# EAGLE board SWARMESH (EAGLE 9.2.0)

Size 100 x 80 mm. Coordinates in mm from the lower left corner, seen from the top.
Outline: 0,0 100,0 100,80 0,80 0,0
Copper layers (1*16): Top 0.035mm / dielectric 1.5mm / Bottom 0.035mm
Design rules "default": minimum track width 6mil, minimum drill 0.35mm, track to track 6mil, track to pad 6mil, pad to pad 6mil, via to via 6mil, smd to smd 6mil, copper to edge 40mil, drill to drill 6mil, minimum pad ring 10mil, minimum via ring 8mil, stop-mask expansion 4mil, vias tented up to drill 0mil, thermal gap 10mil

## Footprints (pad centres in the part's own frame; a part is rotated, then mirrored left to right if it is on the bottom)
1X1-BIGPOGO = drill 1.4 pad 2.54 long: P$1 0,0
C050-024X044 = drill 0.813 octagon: 1 -2.54,0; 2 2.54,0
E2,5-7 = drill 0.813 pad 1.778: + -1.27,0 | drill 0.813 pad 1.778 octagon: - 1.27,0
DIL16 = drill 0.813 long: 1 -8.89,-3.81; 2 -6.35,-3.81; 3 -3.81,-3.81; 4 -1.27,-3.81; 5 1.27,-3.81; 6 3.81,-3.81; 7 6.35,-3.81; 8 8.89,-3.81; 9 8.89,3.81; 10 6.35,3.81; 11 3.81,3.81; 12 1.27,3.81; 13 -1.27,3.81; 14 -3.81,3.81; 15 -6.35,3.81; 16 -8.89,3.81
1X03 = drill 1.016: 1 -2.54,0; 2 0,0; 3 2.54,0
2X04 = drill 1.016 pad 1.676 octagon: 1 -3.81,-1.27; 2 -3.81,1.27; 3 -1.27,-1.27; 4 -1.27,1.27; 5 1.27,-1.27; 6 1.27,1.27; 7 3.81,-1.27; 8 3.81,1.27
1X10-BIG = drill 1.016 pad 1.778 octagon: 1 -11.43,0; 2 -8.89,0; 3 -6.35,0; 4 -3.81,0; 5 -1.27,0; 6 1.27,0; 7 3.81,0; 8 6.35,0; 9 8.89,0; 10 11.43,0
1X06 = drill 1.016 octagon: 1 -6.35,0; 2 -3.81,0; 3 -1.27,0; 4 1.27,0; 5 3.81,0; 6 6.35,0
VIBE-MOTOR-10MM = drill 1.2 pad 2: + 13,-11; - 5,-11 | hole 2.25: 0,0; 18,0
TO220 = drill 1.118 long: 1 -2.54,-6.35; 2 0,-6.35; 3 2.54,-6.35 | hole 3.302: 0,11.176
0207/12 = drill 0.813 pad 1.676 octagon: 1 -6.35,0; 2 6.35,0
PS22F03 = drill 1.3 square: 0 -3.175,5.715; 1 3.835,5.613; 2 3.81,-5.715; 3 -3.175,-5.715 | drill 1 square: C1 -1.27,0; C2 1.702,0; NC1 -1.27,-3.175; NC2 1.727,-3.226; NO1 -1.27,3.175; NO2 1.702,3.15
SPRING-CONNECTOR = smd 7.112 x 7.112: P$2 0,0
ESP32-DEVKITC = drill 1 pad 1.93: 1 -20.33,-12.69; 2 -17.79,-12.69; 3 -15.25,-12.69; 4 -12.71,-12.69; 5 -10.17,-12.69; 6 -7.63,-12.69; 7 -5.09,-12.69; 8 -2.55,-12.69; 9 -0.01,-12.69; 10 2.53,-12.69; 11 5.07,-12.69; 12 7.61,-12.69; 13 10.15,-12.69; 14 12.69,-12.69; 15 15.23,-12.69; 16 17.77,-12.69; 17 20.31,-12.69; 18 22.85,-12.69; 19 25.39,-12.69; 20 25.39,12.5; 21 22.85,12.5; 22 20.31,12.5; 23 17.77,12.5; 24 15.23,12.5; 25 12.69,12.5; 26 10.15,12.5; 27 7.61,12.5; 28 5.07,12.5; 29 2.53,12.5; 30 -0.01,12.5; 31 -2.55,12.5; 32 -5.09,12.5; 33 -7.63,12.5; 34 -10.17,12.5; 35 -12.71,12.5; 36 -15.25,12.5; 37 -17.79,12.5; 38 -20.33,12.5
TO220H = drill 1.118 long: 1 -2.54,-10.16; 2 0,-10.16; 3 2.54,-10.16 | hole 3.302: 0,4.826
1X04-BIG = drill 1.016 pad 1.778: 1 0,0; 2 2.54,0; 3 5.08,0; 4 7.62,0

## Placement (x,y rotation side)
BAT+  [1X1-BIGPOGO]  -92.71,-72.39 0 top  (outside the outline)
BAT-  [1X1-BIGPOGO]  -92.71,-76.2 0 top  (outside the outline)
C2  0.1uF  [C050-024X044]  -49.53,83.82 0 top  (outside the outline)
C3  0.1uF  [C050-024X044]  -57.15,83.82 0 top  (outside the outline)
C5  10uF  [E2,5-7]  -92.71,-26.67 0 top  (outside the outline)
C6  10uF  [E2,5-7]  -92.71,-34.29 0 top  (outside the outline)
CHG1+  [1X1-BIGPOGO]  -92.71,-80.01 0 top  (outside the outline)
CHG1-  [1X1-BIGPOGO]  -92.71,-87.63 0 top  (outside the outline)
CHG2+  [1X1-BIGPOGO]  -92.71,-83.82 0 top  (outside the outline)
CHG2-  [1X1-BIGPOGO]  -92.71,-91.44 0 top  (outside the outline)
IC1  4051N  [DIL16]  -31.75,64.77 0 top  (outside the outline)
J1  [1X03]  -17.78,88.9 0 top  (outside the outline)
J2  [1X03]  -26.67,88.9 0 top  (outside the outline)
J3  [1X03]  -35.56,88.9 0 top  (outside the outline)
J4  [1X03]  -44.45,88.9 0 top  (outside the outline)
JI2C  [2X04]  -25.4,73.66 0 top  (outside the outline)
JIMU  PINHD-1X10  [1X10-BIG]  -44.45,74.93 0 top  (outside the outline)
JM1  [1X06]  -68.58,81.28 0 top  (outside the outline)
JM2  [1X06]  -85.09,81.28 0 top  (outside the outline)
JMUX  PINHD-1X10  [1X10-BIG]  -71.12,74.93 0 top  (outside the outline)
JNPX  [1X03]  -53.34,88.9 0 top  (outside the outline)
M1  MOTOR10MM  [VIBE-MOTOR-10MM]  -83.82,12.7 0 top  (outside the outline)
M2  MOTOR10MM  [VIBE-MOTOR-10MM]  -34.29,44.45 0 top  (outside the outline)
Q1  TIP122  [TO220]  -43.18,40.64 0 top  (outside the outline)
R13  1k  [0207/12]  -66.04,99.06 0 top  (outside the outline)
R14  10k  [0207/12]  -81.28,99.06 0 top  (outside the outline)
R15  47k  [0207/12]  -20.32,104.14 0 top  (outside the outline)
RD1  0  [0207/12]  -66.04,88.9 0 top  (outside the outline)
RD2  0  [0207/12]  -119.38,-101.6 0 top  (outside the outline)
RS1  150  [0207/12]  -119.38,-96.52 0 top  (outside the outline)
RS2  150  [0207/12]  -88.9,-41.91 0 top  (outside the outline)
S2  [PS22F03]  -91.44,-50.8 0 top  (outside the outline)
T1  [SPRING-CONNECTOR]  -123.19,-87.63 0 top  (outside the outline)
T2  [SPRING-CONNECTOR]  -115.57,-87.63 0 top  (outside the outline)
T3  [SPRING-CONNECTOR]  -107.95,-87.63 0 top  (outside the outline)
T4  [SPRING-CONNECTOR]  -100.33,-87.63 0 top  (outside the outline)
U1  ESP32DEVKITC  [ESP32-DEVKITC]  35.56,35.56 0 top
U3  L293D  [DIL16]  -54.61,64.77 0 top  (outside the outline)
U4  7805T  [TO220H]  -80.01,44.45 0 top  (outside the outline)
ULTRA1  1X4-BIG  [1X04-BIG]  -93.98,74.93 0 top  (outside the outline)

## Library data of the parts
BAT+ BAT- C2 C3 C5 C6 CHG1+ CHG1- CHG2+ CHG2- J1-J4 JI2C JIMU JM1 JM2 JMUX JNPX R13-R15 RD1 RD2 RS1 RS2 U4 ULTRA1 = adafruit
IC1 = 40xx
M1 M2 = SparkFun-Electromechanical
Q1 = transistor-npn
S2 = ArduinoNano LearningBot 4-21-18
T1-T4 = SparkFun-Connectors; SF_ID: PRT-11822
U1 = ESP32-DEVKITC (1)
U3 = st-microelectronics; MPN: L293D; OC_FARNELL: 9589619; OC_NEWARK: 56P8249

## Nets
ADO: JIMU.7
E1A: JM1.3
E1B: JM1.4
E2A: JM2.3
E2B: JM2.4
ECL: JIMU.6
EDA: JIMU.5
FSY: JIMU.10
GND: BAT-.P$1 C2.2 C3.2 C5.- C6.- CHG1-.P$1 CHG2-.P$1 IC1.6 IC1.7 IC1.8 J1.3 J2.3 J3.3 J4.3 JI2C.3 JI2C.4 JIMU.2 JM1.5 JM2.5 Q1.3 R14.1 RD2.2 U1.32 U1.38 U3.4 U3.5 U3.12 U3.13 U4.2 ULTRA1.4
INT: JIMU.8
M1A: JM1.1 M1.+ U3.3
M1B: JM1.6 M1.- U3.6
M2A: JM2.1 M2.- U3.14
M2B: JM2.6 M2.+ U3.11
N$1: Q1.1 R13.1
N$2: R13.2
N$3: IC1.13 JMUX.1
N$4: U3.2
N$5: U3.7
N$6: U3.15
N$7: U3.10
N$8: IC1.14 JMUX.2
N$9: IC1.15 JMUX.3
N$10: IC1.12 JMUX.4
N$11: IC1.1 JMUX.5
N$12: IC1.5 JMUX.6
N$13: IC1.2 JMUX.7
N$14: IC1.4 JMUX.8
N$15: C3.1 IC1.3
N$16: C6.+ JMUX.9 RS1.1 RS2.1
N$17: JMUX.10 RD1.2 RD2.1
N$18: IC1.9
N$19: IC1.10
N$20: IC1.11
N$21: BAT+.P$1 S2.NC1
N$23: J1.1
N$27: ULTRA1.2
N$28: ULTRA1.3
N$29: J2.1
N$30: J3.1
N$31: J4.1
N$32: R14.2 R15.1
N$37: Q1.2 RD1.1
N$38: R15.2
NCS: JIMU.9
SCL: JI2C.5 JI2C.6 JIMU.3 U1.36
SDA: JI2C.7 JI2C.8 JIMU.4 U1.33
TOUCH1: T1.P$2 U1.23
TOUCH2: T2.P$2 U1.24
TOUCH3: T3.P$2 U1.25
TOUCH4: T4.P$2 U1.26
V+: C5.+ CHG1+.P$1 CHG2+.P$1 RS2.2 S2.NO1 U3.8 U4.1
VCC: C2.1 IC1.16 J1.2 J2.2 J3.2 J4.2 JI2C.1 JI2C.2 JIMU.1 JM1.2 JM2.2 RS1.2 U1.19 U3.1 U3.9 U3.16 U4.3 ULTRA1.1

## Tracks (layer width: path | path; a pad name or v marks a point on that pad's centre or on a via)
GND  (29 unrouted)
M1A  (2 unrouted)
M1B  (2 unrouted)
M2A  (2 unrouted)
M2B  (2 unrouted)
N$1  (1 unrouted)
N$3  (1 unrouted)
N$8  (1 unrouted)
N$9  (1 unrouted)
N$10  (1 unrouted)
N$11  (1 unrouted)
N$12  (1 unrouted)
N$13  (1 unrouted)
N$14  (1 unrouted)
N$15  (1 unrouted)
N$16  (3 unrouted)
N$17  (2 unrouted)
N$21  (1 unrouted)
N$32  (1 unrouted)
N$37  (1 unrouted)
SCL  (3 unrouted)
SDA  (3 unrouted)
TOUCH1  (1 unrouted)
TOUCH2  (1 unrouted)
TOUCH3  (1 unrouted)
TOUCH4  (1 unrouted)
V+  (6 unrouted)
VCC  (17 unrouted)